# Altium PCB landslide_node.PcbDoc
Units mil, origin at the board's own origin, x right, y up, seen from the top; angles counter-clockwise.
Board outline 6000 x 4000 mil, 2 copper layers (Top Layer, Bottom Layer); 58 components, 38 nets, 192 pads, 0 vias.
Unrouted connection lines stored in the file: 137.
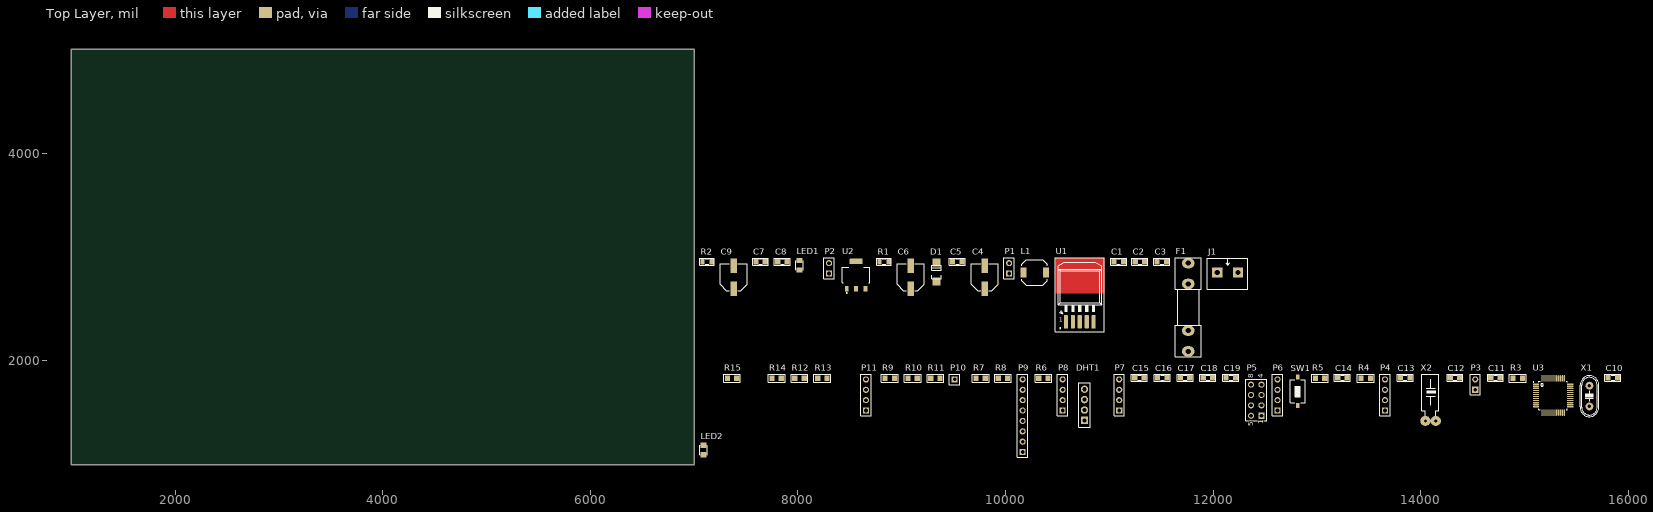
[diagram p0: Top Layer view]
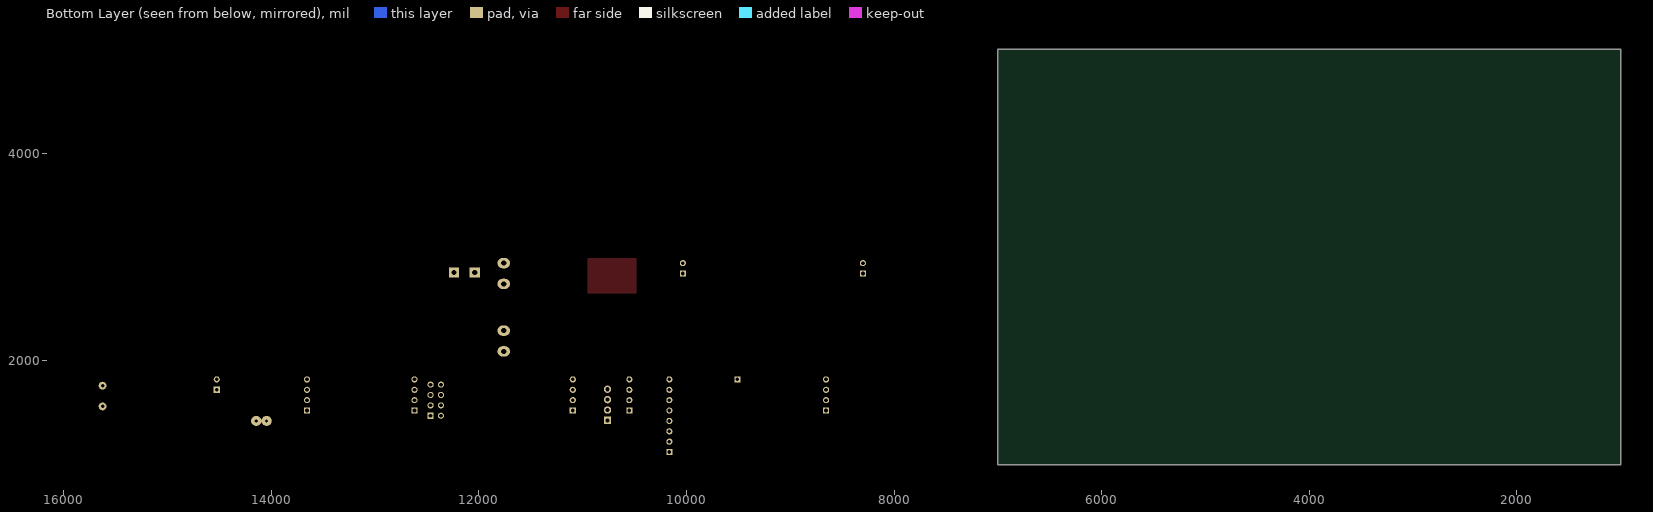
[diagram p1: Bottom Layer view, seen from below]

## Layer stack, top to bottom
Top Solder: solder mask 0.4, Solder Resist, Dk 3.5
Top Layer: signal copper 1.4
Dielectric 1: dielectric 12.6, FR-4, Dk 4.8
Bottom Layer: signal copper 1.4
Bottom Solder: solder mask 0.4, Solder Resist, Dk 3.5

## Board outline
1000,1000 7000,1000 7000,5000 1000,5000

## Design rules (kind name [scope] priority, off if disabled: settings)
Clearance [All] p1: gap=10 ignorepadtopadclearanceinfootprint=FALSE except(0: Arc-Hole Track-Hole SMDPad-Hole THPad-Hole Via-Hole Fill-Hole Poly-Hole Region-Hole Text-Hole)
PolygonConnect [All] p1: connectstyle=Relief reliefconductorwidth=10 reliefentries=4 polygonreliefangle="90 Angle" airgapwidth=10
RoomDefinition power_node [InComponentClass('power_node')] p1: confinementstyle=ConfineIn formatcopy=TRUE lockcomponents=FALSE outline 7045,2030 12345,2030 12345,3100 7045,3100
RoomDefinition mcu_node [InComponentClass('mcu_node')] p2: confinementstyle=ConfineIn formatcopy=TRUE lockcomponents=FALSE outline 7045,1060 15950,1060 15950,1980 7045,1980
RoutingVias [All] p1: holewidth=28 width=50 viastyle="Through Hole" minholewidth=28 minwidth=50 maxholewidth=28 maxwidth=50
SolderMaskExpansion [All] p1: expansion=4 istentingtop=FALSE
Width [All] p1: maxlimit=10 minlimit=10 preferedwidth=10
30 further rules are at their usual default settings.

## Classes and differential pairs
net class POWER: +3V3 +5 GND GND_MCU NetC7_1 NetD1_2 NetF1_1 Vin
component class power_node: C1 C2 C3 C4 C5 C6 C7 C8 C9 D1 F1 J1 L1 LED1 P1 P2 R1 R2 U1 U2
component class mcu_node: C10 C11 C12 C13 C14 C15 C16 C17 C18 C19 DHT1 LED2 P3 P4 P5 P6 P7 P8 P9 P10 P11 R3 R4 R5 R6 R7 R8 R9 R10 R11 R12 R13 R14 R15 SW1 U3 X1 X2

## Components (designator, comment, footprint, x,y, rotation, side; value= is the part's Value field where it differs from the comment)
C1 "104" SM-0805 11090,2955 r0 top value=103
C2 "104" SM-0805 11295,2955 r0 top value=103
C3 "104" SM-0805 11505,2955 r0 top value=103
C4 "100uH/25V" CAP-ALU-SMD-6.3x7.7x2.2 9800,2805 r90 top
C5 "104" SM-0805 9535,2955 r0 top value=103
C6 "470uf/16V" CAP-ALU-SMD-6.3x7.7x2.2 9085,2805 r90 top
C7 "103" SM-0805 7640,2955 r0 top
C8 "103" SM-0805 7850,2955 r0 top
C9 "100uH/16V" CAP-ALU-SMD-6.3x7.7x2.2 7380,2805 r90 top
C10 "22pF" SM-0805 15850,1835 r0 top value=103
C11 "22pF" SM-0805 14720,1835 r0 top value=103
C12 "22pF" SM-0805 14330,1835 r0 top value=103
C13 "22pF" SM-0805 13850,1835 r0 top value=103
C14 "104" SM-0805 13245,1835 r0 top value=103
C15 "104" SM-0805 11290,1835 r0 top value=103
C16 "104" SM-0805 11510,1835 r0 top value=103
C17 "475" SM-0805 11730,1835 r0 top value=103
C18 "103" SM-0805 11950,1835 r0 top
C19 "105" SM-0805 12170,1835 r0 top value=103
D1 "1N5822" Diode_SS34 9335,2855 r90 top
DHT1 "DHT22" DHT22 10760,1575 r90 top
F1 "F2A" FUSE2 11760,2515 r90 top value=Fuse
J1 "KF2" KF2-5.08 12140,2850 r0 top
L1 "Inductor" inductor_smd 10280,2850 r0 top value=100uH
LED1 "LED" LED-0805-Green 8015,2875 r90 top value="LED 3 - 5 ly 2 Colour"
LED2 "LED" LED-0805-Green 7090,1095 r90 top value="LED 3 - 5 ly 2 Colour"
P1 "Header 2" HDR1X2 10035,2840 r90 top
P2 "Header 2" HDR1X2 8300,2840 r90 top
P3 "Header 2" HDR1X2 14525,1720 r90 top
P4 "Header 4" "HDR 1X4" 13655,1520 r90 top
P5 "LORA_SX1278" HDR2X4_CEN 12465,1470 r90 top
P6 "Header 4" HDR1X4 12620,1520 r90 top
P7 "Header 4" HDR1X4 11095,1520 r90 top
P8 "soil_moisture_ss" "HDR 1X4" 10550,1520 r90 top
P9 "Header 8" HDR1X8 10165,1120 r90 top
P10 "RainGauge_ss" "HDR 1X1" 9510,1820 r0 top
P11 "SSD1306" "HDR 1X4" 8655,1520 r90 top
R1 "0R" RES-SMD-0805 8830,2955 r0 top
R2 "100R" RES-SMD-0805 7125,2955 r0 top
R3 "4k7" R-0805 14935,1830 r0 top value=1k
R4 "47R" R-0805 13470,1830 r0 top value=1k
R5 "4k7" R-0805 13030,1830 r0 top value=1k
R6 "4k7" R-0805 10365,1830 r0 top value=1k
R7 "4k7" R-0805 9760,1830 r0 top value=1k
R8 "4k7" R-0805 9975,1830 r0 top value=1k
R9 "4k7" R-0805 8885,1830 r0 top value=1k
R10 "4k7" R-0805 9105,1830 r0 top value=1k
R11 "4k7" R-0805 9325,1830 r0 top value=1k
R12 "4k7" R-0805 8015,1830 r0 top value=1k
R13 "4k7" R-0805 8235,1830 r0 top value=1k
R14 "4k7" R-0805 7795,1830 r0 top value=1k
R15 "4k7" R-0805 7365,1830 r0 top value=1k
SW1 "SW" SW1-SMD 12815,1705 r90 top value="SW chip 2 pin"
U1 "LM2576" TO263 10700,2610 r0 top
U2 "AMS1117-3.3" SOT229P700X180-4N 8560,2825 r0 top
U3 "STM32F030CCT6" QFP50P900X900X160-48N 15275,1665 r0 top
X1 "8Mhz" XT2 15625,1660 r90 top value=4Mhz
X2 "32,768 Khz" XT32k 14045,1420 r90 top value=32,768khz

## Footprints (in the part's own frame and the unit in brackets; to place one, negate y for a bottom-side part, rotate by r counter-clockwise, add the part's x,y. Pads: shape width x height; smd on the part's side, far side on the other; paste and mask are expansions set on the pad)
CAP-ALU-SMD-6.3x7.7x2.2 [mm]
  rect 3.5x1.6 smd: 1(-2.8,0) 2(2.8,0)
  silkscreen extent -3.3,-3.3 3.3,3.3, body extent -3.65,-3.3 3.65,3.3, height 7.65
DHT22 [mm]
  rect 1.8x1.8 hole 1.02: 1(-3.81,0)
  round 1.8 hole 1.02: 2(-1.27,0) 3(1.27,0) 4(3.81,0)
  silkscreen extent -5.46,-1.4 5.46,1.4, body extent -7.86,-5.84 7.61,2.31, height 35.57
Diode_SS34 [mm]
  rect 2x2 smd: 1(-2.35,0) 2(2.35,0)
  silkscreen extent -1.65,-1.1 1.7,1.2, body extent -2.57,-1.82 2.73,1.78, height 2.4
FUSE2 [mil] "De Fuse"
  oval 100x120 hole 50: 1(-425,0) 1(-225,0) 2(225,0) 2(425,0)
  silkscreen extent -475,-125 475,125, body extent -448,-117 459,127, height 378
HDR1X2 [mm] "Connector; Header; 2 Position"
  rect 1.5x1.5 hole 0.9: 1(0,0)
  round 1.5 hole 0.9: 2(2.54,0)
  silkscreen extent -1.27,-1.27 3.81,1.27, body extent -1.27,-1.27 3.81,1.27, height 7
HDR1X4 [mm] "Connector; Header; 4 Position"
  rect 1.5x1.5 hole 0.9: 1(0,0)
  round 1.5 hole 0.9: 2(2.54,0) 3(5.08,0) 4(7.62,0)
  silkscreen extent -1.27,-1.27 8.89,1.27, body extent -1.27,-1.27 8.89,1.27, height 7
HDR1X8 [mm] "Connector; Header; 8 Position"
  rect 1.5x1.5 hole 0.9: 1(0,0)
  round 1.5 hole 0.9: 2(2.54,0) 3(5.08,0) 4(7.62,0) 5(10.16,0) 6(12.7,0) 7(15.24,0) 8(17.78,0)
  silkscreen extent -1.27,-1.27 19.05,1.27, body extent -1.27,-1.27 19.05,1.27, height 7
HDR2X4_CEN [mm] "Connector; Header; 4x2 Position"
  rect 1.5x1.5 hole 0.9: 1(0,0)
  round 1.5 hole 0.9: 2(2.54,0) 3(5.08,0) 4(7.62,0) 5(0,2.54) 6(2.54,2.54) 7(5.08,2.54) 8(7.62,2.54)
  silkscreen extent -1.27,-1.27 8.89,3.81, body extent -1.27,-1.27 8.89,3.81, height 7
"HDR 1X1" [mm] "Generic Antenna; 1 Lead"
  rect 1.5x1.5 hole 0.9: 1(0,0)
  silkscreen extent -1.27,-1.27 1.27,1.27, body extent -1.26,-1.27 1.27,1.26, height 8.51
"HDR 1X4" [mm] "Connector; Header; 4 Position"
  rect 1.5x1.5 hole 0.9: 1(0,0)
  round 1.5 hole 0.9: 2(2.54,0) 3(5.08,0) 4(7.62,0)
  silkscreen extent -1.27,-1.27 8.89,1.27, body extent -1.26,-1.27 8.89,1.26, height 8.51
inductor_smd [mm] "SM Inductor; 2 Leads; Body 6.3x6.3mm (LxW)"
  rect 1.5x2.4 smd: 1(-2.75,0) 2(2.75,0)
  silkscreen extent -3.15,-3.15 3.15,3.15, body extent -3.65,-3.65 3.65,3.65, height 4
KF2-5.08 [mm]
  rect 2.5x2.5 hole 1.3: 1(-2.54,0) 2(2.54,0)
  silkscreen extent -4.95,-4.08 4.95,3.43, body extent -5,-4.07 5,3.43, height 10
LED-0805-Green [mil]
  rect 50x55 smd: 1(0,0) 2(90,0)
  silkscreen extent 0,-35 90,35, body extent 5,-25 85,25, height 43
QFP50P900X900X160-48N [mm]
  rrect70% 1.56x0.3 smd: 1(-4.18,2.75) 2(-4.18,2.25) 3(-4.18,1.75) 4(-4.18,1.25) 5(-4.18,0.75) 6(-4.18,0.25) 7(-4.18,-0.25) 8(-4.18,-0.75) 9(-4.18,-1.25) 10(-4.18,-1.75) 11(-4.18,-2.25) 12(-4.18,-2.75) 25(4.18,-2.75) 26(4.18,-2.25) 27(4.18,-1.75) 28(4.18,-1.25) 29(4.18,-0.75) 30(4.18,-0.25) 31(4.18,0.25) 32(4.18,0.75) 33(4.18,1.25) 34(4.18,1.75) 35(4.18,2.25) 36(4.18,2.75)
  rrect70% 0.3x1.56 smd: 13(-2.75,-4.18) 14(-2.25,-4.18) 15(-1.75,-4.18) 16(-1.25,-4.18) 17(-0.75,-4.18) 18(-0.25,-4.18) 19(0.25,-4.18) 20(0.75,-4.18) 21(1.25,-4.18) 22(1.75,-4.18) 23(2.25,-4.18) 24(2.75,-4.18) 37(2.75,4.18) 38(2.25,4.18) 39(1.75,4.18) 40(1.25,4.18) 41(0.75,4.18) 42(0.25,4.18) 43(-0.25,4.18) 44(-0.75,4.18) 45(-1.25,4.18) 46(-1.75,4.18) 47(-2.25,4.18) 48(-2.75,4.18)
  silkscreen extent -4.81,-3.5 3.5,3.5
R-0805 [mil] "Compoment SMD 80x50mil"
  rect 50x55 smd: 1(-45,0) 2(45,0)
  silkscreen extent -81,-39 81,39, body extent -39,-25 39,25, height 31
RES-SMD-0805 [mil]
  rect 39.37x55 smd: 1(-45,0) 2(45,0)
  silkscreen extent -70,-34 70,33, body extent -39,-25 39,25, height 31
SM-0805 [mil] "Compoment SMD 80x50mil"
  rect 50x55 smd: 1(-45,0) 2(45,0)
  silkscreen extent -77,-34 76,33, body extent -40,-27 40,23, height 24
SOT229P700X180-4N [mm]
  rrect15% 0.93x1.31 smd: 1(-2.29,-3.345) 2(0,-3.345) 3(2.29,-3.345)
  rrect15% 3.24x1.31 smd: 4(0,3.345)
  silkscreen extent -3.36,-4.47 3.36,1.86
SW1-SMD [mm]
  rect 1.2x0.8 smd: 1(-3.5,0) 2(3.5,0)
  silkscreen extent -2.82,-1.85 2.82,1.85, body extent -3.05,-1.85 3.05,1.85, height 2.5
TO263 [mm]
  rrect50% 1x3.4 smd: 1(-3.019,-5.969) 2(-1.319,-5.969) 4(2.081,-5.969) 5(3.781,-5.969)
  rrect50% 1x3.4 smd mask+0: 3(0.381,-5.969)
  Top Layer region: -5.568,1.016 6.432,1.016 6.432,9.65 -5.568,9.65
  silkscreen extent -5.57,-8.35 6.43,9.65, body extent -4.73,-6.84 5.43,7.8, height 4.57
XT2 [mil] "Footpin for Crystal 2 pin"
  round 75 hole 34: 1(-100,0) 2(100,0)
  silkscreen extent -198,-90 195,90, body extent -233,-93 213,90, height 138
XT32k [mil] "Crystal 32k, 2 pin, real timer for DS1307"
  oval 95x100 hole 32: 1(0,0) 2(0,-100)
  silkscreen extent 50,-130 449,36

## Part data
C1 C2 C3 C5 C7 C8 C10 C11 C12 C13 C14 C15 C16 C17 C18 C19: library part CM, "Cap SMD"
C4 C6 C9: library part CN-ALU-SMD, "Polarized Capacitor (Axial)", LatestRevisionDate=17-Jul-2002, LatestRevisionNote="Re-released for DXP Platform.", PackageReference=POLAR0.8, Published=8-Jun-2000, Publisher="Altium Limited"
D1: library part 1N5819, "Schottky diode"
DHT1: Manufacturer="W¨¹rth Elektronik eiSos GmbH", partNo=613004143121, ComponentLink1 Description=Manufacturer, ComponentLink1URL=http://www.we-online.com, ComponentLink2 Description=Datasheet, ComponentLink2URL=http://katalog.we-online.de/em/datasheet/6130xx143121.pdf, Created by="Karrer Zheng", Created Date="29 March 2013", NoPins=04
F1: library part Fuse, "Fuse", Designed by=VanDungEvn
J1: Manufacturer="Würth Elektronik eiSos GmbH", partNo=691103110002, ComponentLink1 Description=Manufacturer, ComponentLink1URL=http://www.we-online.com, ComponentLink2 Description=Datasheet, ComponentLink2URL=http://katalog.we-online.de/em/datasheet/6911031100xx.pdf, Created by="Karrer Zheng", Created Date="29 October 2013", NoPins=2
LED1 LED2: library part "LED SMD"
P1 P2 P3: "Header, 2-Pin", LatestRevisionDate=17-Jul-2002, LatestRevisionNote="Re-released for DXP Platform.", Publisher="Altium Limited"
P4 P6 P7: "Header, 4-Pin"
  P6 P7: LatestRevisionDate=17-Jul-2002, LatestRevisionNote="Re-released for DXP Platform.", Publisher="Altium Limited"
P5: library part "Header 4X2A", "Header, 4-Pin, Dual row", LatestRevisionDate=17-Jul-2002, LatestRevisionNote="Re-released for DXP Platform.", Publisher="Altium Limited"
P8 P11: library part "Header 4", "Header, 4-Pin"
P9: "Header, 8-Pin", LatestRevisionDate=17-Jul-2002, LatestRevisionNote="Re-released for DXP Platform.", Publisher="Altium Limited"
P10: library part "Header 1", "Header, 1-Pin"
R1 R2: library part Res-SMD, "Resistor", Manufacturer="Generic Components", Class=Passive, Published=08/06/2000, Publisher="Altium Hobart Technology Centre"
R3 R4 R5 R6 R7 R8 R9 R10 R11 R12 R13 R14 R15: library part resistor, "dien tro"
SW1: library part SW2, "Switch button 2 pin"
U1: Max Input Voltage="12 V", Max Output Current="3 (6.0 peak) A", Max Output Voltage=mV, Temperature Range="-40 to +125 degC", Category=IC-Power, Min Input Voltage=mV, Min Output Voltage=mV, Mounting Technology="Surface Mount", Status=Unreleased, Supply Voltage=mV
U2: "Sot223/Pkg 1-Amp 3.3-Volt Low Drop Out Voltage Regulatator", Package=None, Availability=Unavailable, MF="Advanced Monolithic Systems", MP=AMS1117-3.3, Price=None, SnapEDA_Link=https://www.snapeda.com/parts/AMS1117-3.3/Advanced%20Monolithic%20Systems/view-part/53450/?ref=snap
U3: "ARMÂ® CortexÂ®-M0 STM32F0 Microcontroller IC 32-Bit 48MHz 256KB _256K x 8_ FLASH 48-LQFP _7x7_", Package="LQFP-48 STMicroelectronics", Digi-Key_Part_Number=497-17332-2-ND, Digi-Key_Purchase_URL=https://www.digikey.com.ar/product-detail/en/stmicroelectronics/STM32F030CCT6TR/497-17332-2-ND/6833532?utm_source=snapeda&utm_medium=aggregator&utm_campaign=symbol, MF=STMicroelectronics, MP=STM32F030CCT6, SnapEDA_Link=https://www.snapeda.com/parts/STM32F030CCT6/STMicroelectronics/view-part/447161/?ref=snap
X1: library part XT2, "Crystal For all Crystal 2pin."
X2: library part XT32k, "Crystal 32,768kHz for timer real"
L1: Published=8-Jun-2000, Publisher="Altium Limited", Revision="July-2002: Re-released for DXP Platform."

## Nets (pads, with @x,y where several pads share a name; then routed paths per layer and width w, separated by ;. In a path a pad name is that pad's centre, name@x,y a point inside that pad or via, vN(x,y) a via of type N, cw(c..) or ccw(c..) an arc to the next point about the centre after c; other vN are vias at no path point)
+3V3: C8.1 C15.2 C16.2 C17.2 C18.2 C19.2 DHT1.1 LED1.1 P2.1 P3.1 P4.4 P5.4 P6.3 P7.3 P8.1 P9.1 P11.2 R5.2 R6.1 R7.2 R8.2 R9.2 R10.2 R11.2 R14.1 R15.1 U2.2 U3.1 U3.9 U3.24 U3.36 U3.48
+5: C6.1 L1.2 P1.1 R1.1 U1.4
data_DHT22: DHT1.2 R6.2 U3.2
GND: C1.1 C2.1 C3.1 C4.2 C5.2 C6.2 C7.2 C8.2 C9.2 D1.1 J1.1 P1.2 P2.2 R2.2 U1.3 U1.5 U2.1
GND_MCU: C1.2 C2.2 C3.2 C10.1 C11.1 C12.1 C13.1 C14.2 C15.1 C16.1 C17.1 C18.1 C19.1 DHT1.4 LED2.2 P3.2 P4.1 P5.8 P6.4 P7.4 P8.2 P9.2 P11.1 R3.2 R12.2 R13.2 SW1.2 U3.8 U3.23 U3.35 U3.47
LORA_DIO0: P5.1 U3.20
LORA_MISO: P5.5 U3.16
LORA_MOSI: P5.2 U3.17
LORA_NSS: P5.3 U3.18
LORA_RST: P5.7 U3.19
LORA_SCK: P5.6 U3.15
MCU_RX1: P6.1 U3.43
MCU_RX2: P7.1 U3.13
MCU_TX1: P6.2 U3.42
MCU_TX2: P7.2 U3.12
MPU_INT: P9.8 R11.1 U3.11
MPU_SCL: P9.3 R9.1 U3.30
MPU_SDA: P9.4 R10.1 U3.31
NetC7_1: C7.1 C9.1 R1.2 U2.3
NetD1_2: D1.2 L1.1 U1.2
NetF1_1: F1.1 J1.2
NetLED1_2: LED1.2 R2.1
NetLED2_1: LED2.1 R4.1
NetP9_7: P9.7 R7.1 R12.1
NetR3_1: R3.1 U3.44
NRST: C14.1 R5.1 SW1.1 U3.7
OSC32_IN: C12.2 U3.3 X2.2
OSC32_OUT: C13.2 U3.4 X2.1
OSC_IN: C10.2 U3.5 X1.2
OSC_OUT: C11.2 U3.6 X1.1
Rain_pulse: P10.1 R8.1 R13.1 U3.14
soil_AO: P8.4 U3.10
SSD1306_SCL: P11.3 R14.2 U3.21
SSD1306_SDA: P11.4 R15.2 U3.22
STM_STATUS: R4.2 U3.25
SWCLK: P4.3 U3.37
SWDIO: P4.2 U3.34
Vin: C4.1 C5.1 F1.2 U1.1
pads on no net: DHT1.3 P8.3 P9.5 P9.6 U2.4 U3.26 U3.27 U3.28 U3.29 U3.32 U3.33 U3.38 U3.39 U3.40 U3.41 U3.45 U3.46

## Text inside footprints (layer, text, board x,y; h text height)
P5: Top Overlay "5" at 12385,1370 h50 r90; Top Overlay "1" at 12485,1390 h50 r90; Top Overlay "4" at 12485,1830 h50 r90; Top Overlay "8" at 12385,1830 h50 r90
U1: Top Overlay "1" at 10517.14,2377 h39.37